# Altium PCB PowerRegulationBoardV2.PcbDoc
Units mm, origin at the board's own origin, x right, y up, seen from the top; angles counter-clockwise.
Board outline 164.97 x 158.5 mm, 2 copper layers (Top Layer, Bottom Layer); 34 components, 25 nets, 116 pads, 5 vias.
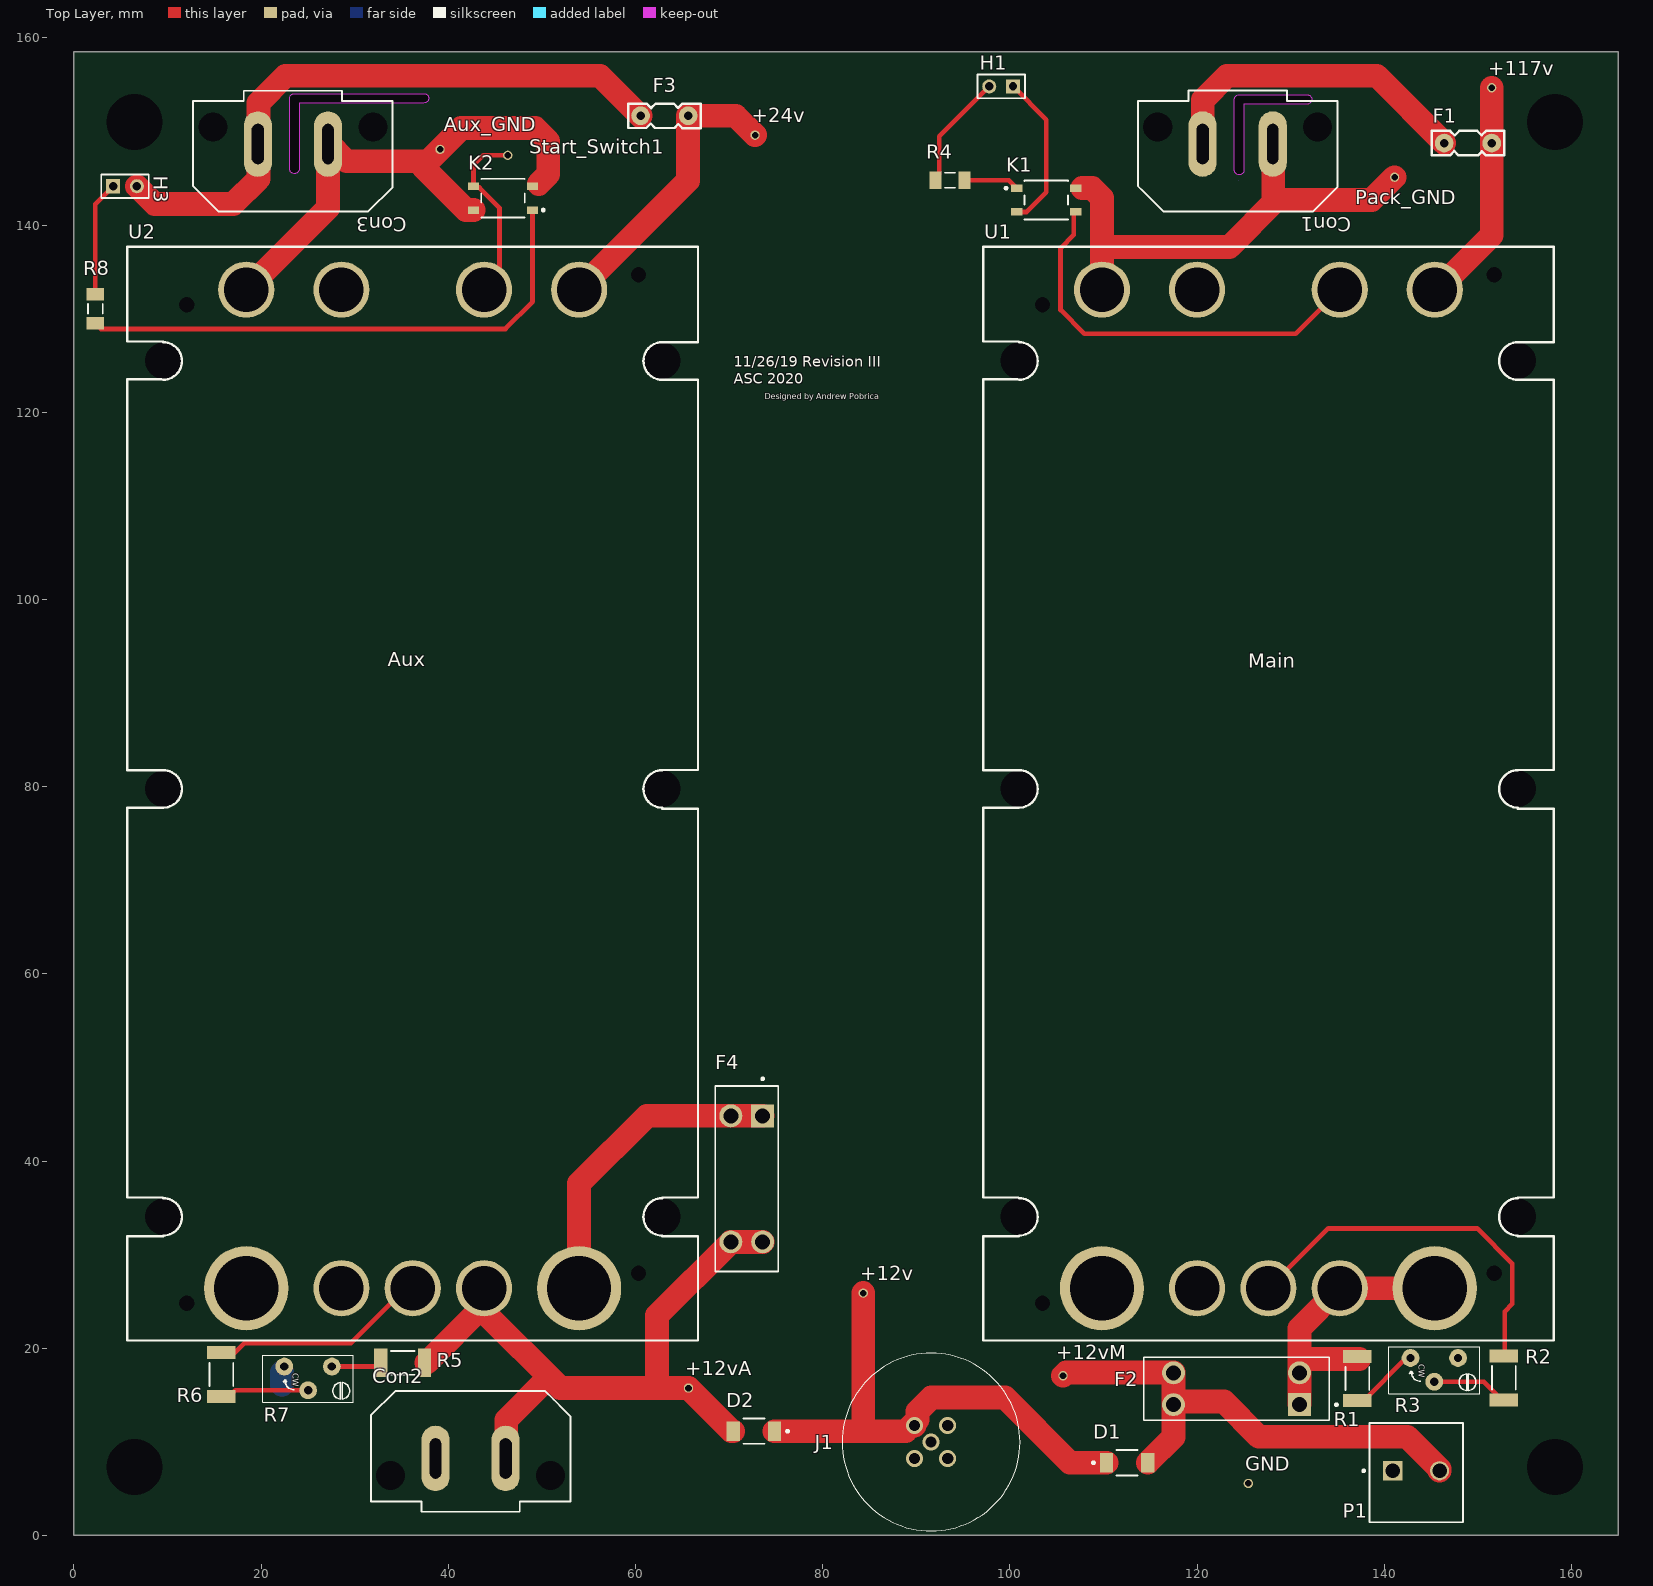
[diagram p0: Top Layer view]
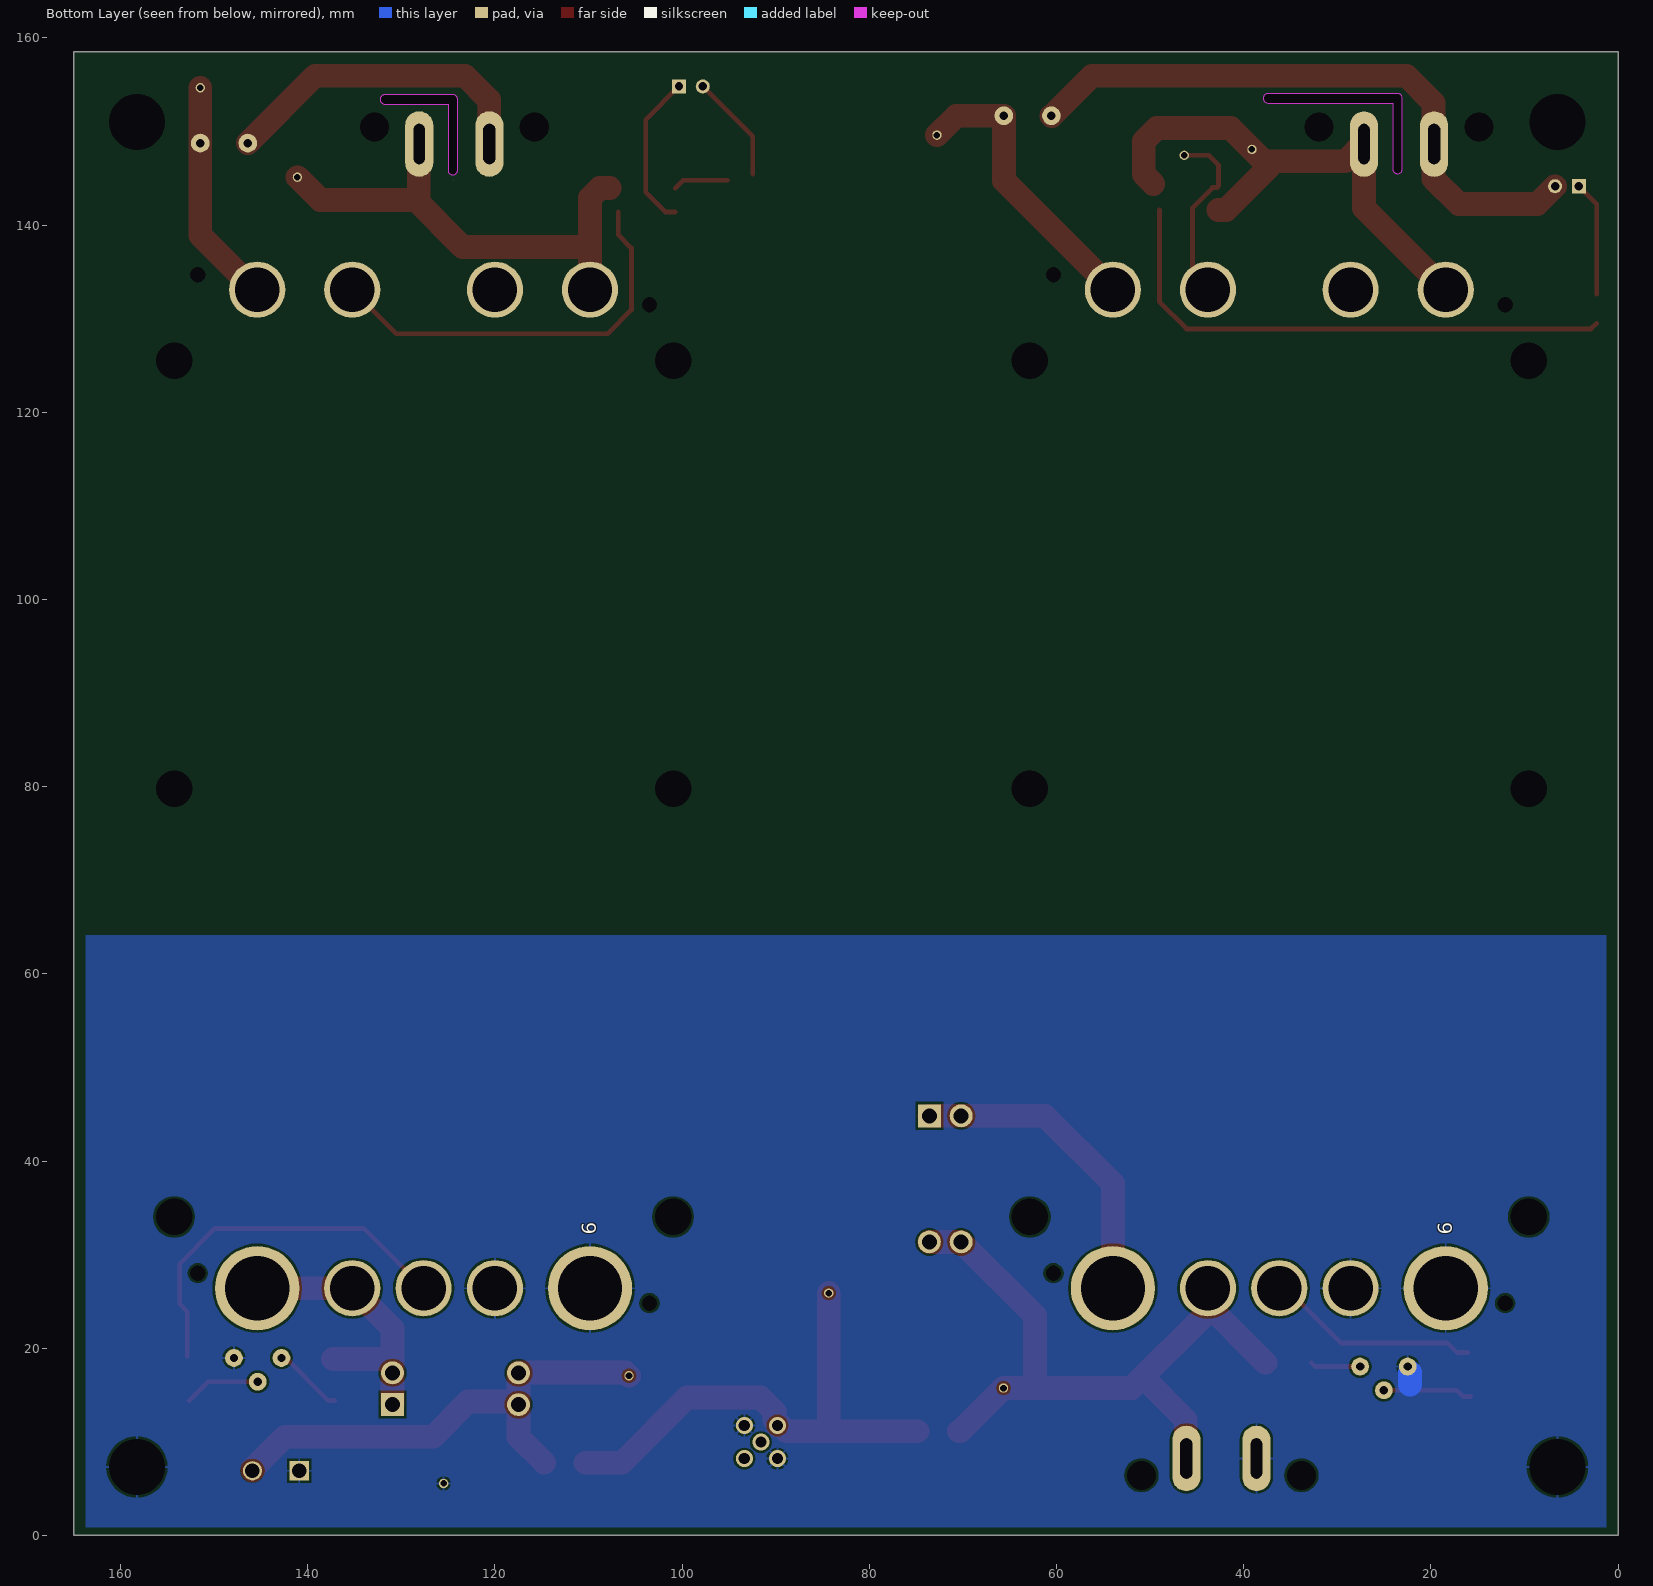
[diagram p1: Bottom Layer view, seen from below]

## Layer stack, top to bottom
Top Solder: solder mask 0.0102, Solder Resist, Dk 3.5
Top Layer: signal copper 0.0356
Dielectric 1: dielectric 0.32, FR-4, Dk 4.8
Bottom Layer: signal copper 0.0356
Bottom Solder: solder mask 0.0102, Solder Resist, Dk 3.5

## Board outline
0,0 164.973,0 164.973,158.496 0,158.496
cut-out: 23.558,145.496 cw(c23.554,146.002) 23.051,145.953 23.051,153.594 cw(c23.554,153.545) 23.558,154.051 37.402,154.051 cw(c37.378,153.52) 37.91,153.543 cw(c37.379,153.566) 37.402,153.035 24.067,153.035 24.067,145.953 cw(c23.563,146.002)
cut-out: 124.498,145.369 cw(c124.494,145.875) 123.99,145.826 123.99,153.467 cw(c124.494,153.418) 124.498,153.924 131.788,153.924 cw(c131.739,153.42) 132.245,153.416 cw(c131.739,153.412) 131.788,152.908 125.006,152.908 125.006,145.826 cw(c124.502,145.875)
cut-out: 124.46,144.78

## Design rules (kind name [scope] priority, off if disabled: settings)
Clearance [All] p1: gap=0.254 ignorepadtopadclearanceinfootprint=FALSE except(0: Arc-Hole Track-Hole SMDPad-Hole THPad-Hole Via-Hole Fill-Hole Poly-Hole Region-Hole Text-Hole)
HoleSize [All] p1: absolutevalues=TRUE maxlimit=12.7 minlimit=0.025 maxpercent=80.000 minpercent=20.000
MinimumSolderMaskSliver [All] p1: minsoldermaskwidth=0.127
PolygonConnect [All] p1: connectstyle=Relief reliefconductorwidth=0.254 reliefentries=4 polygonreliefangle="90 Angle" airgapwidth=0.254
RoomDefinition PowerRegulationBoardV2 [InComponentClass('PowerRegulationBoardV2')] p1: confinementstyle=ConfineIn formatcopy=TRUE lockcomponents=FALSE outline -11.811,-0.508 185.928,-0.508 185.928,162.052 -11.811,162.052
RoutingVias [All] p1: holewidth=0.711 width=1.27 viastyle="Through Hole" minholewidth=0.711 minwidth=1.27 maxholewidth=0.711 maxwidth=1.27
SilkToSilkClearance [All] p1: silktosilkclearance=0.127
SilkToSolderMaskClearance [IsPad] p1: minsilkscreentomaskgap=0.076 clearancetoexposedcopper=TRUE
SolderMaskExpansion [All] p1: expansion=0.102
Width Power [InNetClass('PowerNets')] p1: maxlimit=2.54 minlimit=0.635 preferedwidth=2.54 minimp=50.000000 maximp=50.000000 favimp=50.000000
Width [All] p2: maxlimit=0.508 minlimit=0.508 preferedwidth=0.508 minimp=50.000000 maximp=50.000000 favimp=50.000000
26 further rules are at their usual default settings.

## Classes and differential pairs
net class PowerNets: 13.8V_Aux +12 GND Net+12vA_1 Net+12vM_1 Net+24v_1 Net+117v_1 NetAux_GND_1 NetCon1_1 NetCon1_2 NetCon3_2 NetF2_1

## Components (designator, comment, footprint, x,y, rotation, side; value= is the part's Value field where it differs from the comment)
+12v "Testpoint" TestPoint 84.328,25.892 r90 top
+12vA "Testpoint" TestPoint 65.659,15.748 r0 top
+12vM "Testpoint" TestPoint 105.672,17.064 r0 top
+24v "Testpoint" TestPoint 72.771,149.606 r90 top
+117v "Testpoint" TestPoint 151.471,154.67 r90 top
Aux_GND "Testpoint" TestPoint 39.116,148.082 r90 top
Con1 "Battery Con" "Battery Con" 124.682,148.757 r180 top
Con2 "Battery Con" "Battery Con" 42.037,8.128 r0 top
Con3 "Battery Con" "Battery Con" 23.742,148.751 r180 top
D1 "PMEG3050EP,115" Nexperia_SOD128_0 112.522,7.769 r0 top
D2 "PMEG3050EP,115" Nexperia_SOD128_0 72.644,11.142 r180 top
F1 "PC TRON Fuse 5A" "PC TRON 5A" 148.971,148.717 r0 top
F2 "3557-2" Keystone_3557-2_0 124.206,15.675 r180 top
F3 "PC TRON Fuse 5A" "PC TRON 5A" 63.119,151.638 r0 top
F4 "3557-2" Keystone_3557-2_0 71.882,38.1 r270 top
GND "Testpoint" TestPoint 125.476,5.556 r90 top
H1 "Header 0" HDR1X2 100.33,154.813 r180 top
H3 "Header 0" HDR1X2 4.191,144.145 r0 top
J1 "1542761" 1542761 91.577,9.978 r225 top
K1 "CPC1117N" CPC1117N 103.886,142.67 r270 top
K2 "CPC1117N" CPC1117N 45.847,142.875 r90 top
P1 "SCREW-5.0/5.08 2WAYS" SCREW-5.0-2WAYS_V 143.401,6.909 r0 top
Pack_GND "Testpoint" TestPoint 141.097,145.114 r90 top
R1 "Thick Film" Vishay_WSL2010_0 137.115,16.764 r90 top value=20k
R2 "Thick Film" Vishay_WSL2010_0 152.768,16.842 r90 top value=91k
R3 "25 Turn" "TrimPot_THT_2.54mm pitch" 147.879,18.966 r270 top value=10k
R4 "RK73H2BTTD3320F" KOA_Speer_RK73H2B_IPC_A 93.599,144.78 r0 top
R5 "Thick Film" Vishay_WSL2010_0 35.126,18.447 r0 top value=20k
R6 "Thick Film" Vishay_WSL2010_0 15.752,17.197 r90 top value=91k
R7 "25 Turn" "TrimPot_THT_2.54mm pitch" 27.559,18.049 r270 top value=10K
R8 "CRCW12065K60FKEA" Vishay_CRCW1206_IPC_A 2.286,131.064 r270 top
Start_Switch1 "Testpoint" TestPoint 46.347,147.447 r0 top
U1 "DC-DC converter Maxi" "Vicor DC-DC Maxi" 127.615,73.406 r0 top
U2 "DC-DC converter Maxi" "Vicor DC-DC Maxi" 36.195,73.406 r0 top

## Footprints (in the part's own frame and the unit in brackets; to place one, negate y for a bottom-side part, rotate by r counter-clockwise, add the part's x,y. Pads: shape width x height; smd on the part's side, far side on the other; paste and mask are expansions set on the pad)
1542761 [mm]
  round 1.8 hole 1.2: 1(-2.5,0) 2(0,-2.5) 3(2.5,0) 4(0,2.5) 5(0,0)
  silkscreen extent -9.5,-9.5 9.5,9.5
"Battery Con" [mm] "Battery Connector for both Aux and Main battery"
  oval 3x7 hole 1.2 slot 4.3 at 90 deg: 1(-3.4,0.1)
  oval 3x7 hole 1.3 slot 4.3 at 90 deg: 2(4.09,0.1)
  round 0 hole 3.1 unplated: ""(-8.2,-1.705) ""(8.89,-1.705)
  silkscreen extent -10.3,-5.6 11,7.3
CPC1117N [mm]
  rect 0.8x1.2 smd paste+0 mask+0: 1(-1.27,-3.15) 2(1.27,-3.15) 3(1.27,3.15) 4(-1.27,3.15)
  silkscreen extent -2.07,-4.42 2.07,2.32, body extent -2.17,-3.85 2.17,3.85, height 0.25
HDR1X2 [mm] "Connector; Header; 2 Position"
  rect 1.5x1.5 hole 0.9: 1(0,0)
  round 1.5 hole 0.9: 2(2.54,0)
  silkscreen extent -1.27,-1.27 3.81,1.27
Keystone_3557-2_0 [mm]
  rect 2.45x2.45 hole 1.6 paste-1000 mask+0: 1(-6.735,1.7)
  round 2.45 hole 1.6 paste-1000 mask+0: 2(6.735,1.7) 3(-6.735,-1.7) 4(6.735,-1.7)
  silkscreen extent -10.8,-3.36 9.9,3.36, body extent -10.08,-3.54 10.08,3.54, height 0.25
KOA_Speer_RK73H2B_IPC_A [mm]
  rect 1.306x1.858 smd paste+0 mask+0: 1(-1.551,0) 2(1.551,0)
  silkscreen extent -0.52,-0.8 0.52,0.8, body extent -2.7,-1.43 2.7,1.43, height 0.25
Nexperia_SOD128_0 [mm]
  rect 1.4x2.1 smd paste-1000 mask+0: 1(-2.2,0) 2(2.2,0)
  silkscreen extent -3.72,-1.35 1.12,1.35, body extent -3.1,-1.7 3.1,1.7, height 0.25
"PC TRON 5A" [mm]
  round 2 hole 0.9: 1(-2.58,0.04) 2(2.5,0.04)
  silkscreen extent -3.91,-1.28 3.84,1.34
SCREW-5.0-2WAYS_V [mm] "Socket, Screw Terminal Block, 2-Leads, Pitch 5mm, 90 Degree Angle, Through-Hole"
  rect 2.05x2.05 hole 1.55: 1(-2.5,0)
  round 2.05 hole 1.55: 2(2.5,0)
  silkscreen extent -5.72,-5.5 5,5.1, body extent -5,-5.5 5.02,5.1, height 18.2
TestPoint [mm]
  round 1 hole 0.7: 1(0,0)
"TrimPot_THT_2.54mm pitch" [mil] "TRIMMER, MURATA, PV36Y"
  round 75 hole 35: 1(0,0) 2(100,-100) 3(0,-200)
  silkscreen extent -47,-291 150,91, body extent -47,-287 150,91, height 445
"Vicor DC-DC Maxi" [mm] "DC-DC converter that suits both Maxi and Mini version"
  round 6 hole 4.75: 1(17.78,59.69) 2(7.62,59.69) 3(-7.62,59.69) 4(-17.78,59.69) 6(7.62,-46.99) 7(0,-46.99) 8(-7.62,-46.99)
  round 9 hole 6.86: 5(17.78,-46.99) 9(-17.78,-46.99)
  round 3.38 hole 3.9: 10(-26.65,-39.37) 11(26.65,-39.37) 12(26.65,6.35) 13(26.65,52.07) 14(-26.65,52.07) 15(-26.65,6.35)
  round 0 hole 1.626: ""(-24.13,-48.59) ""(-24.13,58.09) ""(24.13,-45.39) ""(24.13,61.29)
  silkscreen extent -30.48,-52.58 30.48,64.26
Vishay_CRCW1206_IPC_A [mm]
  rect 1.306x1.858 smd paste+0 mask+0: 1(-1.551,0) 2(1.551,0)
  silkscreen extent -0.52,-0.8 0.52,0.8, body extent -2.7,-1.43 2.7,1.43, height 0.25
Vishay_WSL2010_0 [mm]
  rect 1.4x3.05 smd paste+0 mask+0: 1(-2.35,0) 2(2.35,0)
  silkscreen extent -1.25,-1.28 1.25,1.28, body extent -3.15,-1.63 3.15,1.63, height 0.25

## Part data
Con1 Con2 Con3: "Aux and Main battery connector"
H1 H3: library part "Header 2", "Header, 2-Pin", LatestRevisionDate=17-Jul-2002, LatestRevisionNote="Re-released for DXP Platform.", Publisher="Altium Limited"
J1: "Connector", Manufacturer_Name="Phoenix Contact", Mouser Part Number=651-1542761, RS Part Number=8025583, Allied_Number=70170366, Allied Price/Stock=https://www.alliedelec.com/phoenixcontact-1542761/70170366/, Datasheet Link=https://media.digikey.com/PDF/Data%20Sheets/Phoenix%20Contact%20PDFs/1542761.pdf, Height=18mm, Manufacturer_Part_Number=1542761, Mouser Price/Stock=https://www.mouser.com/Search/Refine.aspx?Keyword=651-1542761, RS Price/Stock=http://uk.rs-online.com/web/p/products/8025583
P1: library part CMP-0617-00009-1, "Socket, Screw Terminal Block, 2 Way, 5.0 mm Pitch, 90 Degree Angle, Through-Hole", Contact Resistance="20 mOhm", Insulation Resistance="5000 MOhm / 1000 V", Manufacturer="No Vendor", Rated Current="25 A", Rated Voltage="300 V", Temperature Range="-40 to 105 degC", ComponentLink1Description=Datasheet, ComponentLink1URL="5mm screw terminal in SVN", Mounting Technology="Through Hole", PackageDescription="Socket, Screw Terminal Block, 2 Way, Pitch 5 mm, 90 Degree Angle, Through-Hole", PartNumber="SCREW-5.0/5.08 2WAYS", Poles=2
R1: library part RES_10R_2010_5%, "RES SMD 20K OHM 1% 3/4W 2010", Manufacturer 1=Vishay/Dale, Manufacturer Part Number 1=CRCW120610R0JNEA, Package / Case=2010, Ratings=1/4W, Supplier Part Number 1=541-10ECT-ND, Tolerance=±5%, ComponentLink1Description=http://www.vishay.com/doc?20035, ComponentLink1URL=http://www.vishay.com/doc?20035, SCDType=undef, Supplier 1=Digi-Key
R2 R6: library part RES_10R_2010_5%, "RES SMD 91K OHM 5% 3/4W 2010  /  CRCW201091K0JNEF", Manufacturer 1=Vishay/Dale, Manufacturer Part Number 1=CRCW120610R0JNEA, Package / Case=2010, Ratings=1/4W, Supplier Part Number 1=541-10ECT-ND, Tolerance=±5%, ComponentLink1Description=http://www.vishay.com/doc?20035, ComponentLink1URL=http://www.vishay.com/doc?20035, SCDType=undef, Supplier 1=Digi-Key
R3 R7: library part RES_TRIMMER_1K_25T_THT, "TRIMMER 10K OHM 0.25W PC PIN TOP  /  64WR10KLF", Manufacturer 1="Murata Electronics North America", Manufacturer Part Number 1=PV36Y102C01B00, Ratings="25 turn variable cermet", Supplier Part Number 1=490-2912-ND, Tolerance=10%, SCDType=spec, Supplier 1=Digi-Key
R4: Part Number=332O
R5: library part RES_10R_2010_5%, "RES SMD 20K OHM 1% 3/4W 2010 /  CRCW20101K20FKEF", Manufacturer 1=Vishay/Dale, Manufacturer Part Number 1=CRCW120610R0JNEA, Package / Case=2010, Ratings=1/4W, Supplier Part Number 1=541-10ECT-ND, Tolerance=±5%, ComponentLink1Description=http://www.vishay.com/doc?20035, ComponentLink1URL=http://www.vishay.com/doc?20035, SCDType=undef, Supplier 1=Digi-Key
R8: Part Number=5.6kO
D1 D2: Part Number=PMEG3050EP,115
F2: Part Number=3557-2

## Free pads (board coordinates)
  round 0 hole 6: 5(6.477,7.31) 5(6.477,151.003) 5(158.242,7.31) 5(158.242,151.003)

## Via types
v1: diameter 1.8, hole 1.2, Top Layer to Bottom Layer, 5 vias

## Nets (pads, with @x,y where several pads share a name; then routed paths per layer and width w, separated by ;. In a path a pad name is that pad's centre, name@x,y a point inside that pad or via, vN(x,y) a via of type N, cw(c..) or ccw(c..) an arc to the next point about the centre after c; other vN are vias at no path point)
13.8V_Aux: F4.1 F4.3 U2.5 | length 34.3
  Top Layer w2.54: U2.5@53.58,26.021 U2.5 53.975,37.592 61.218,44.835 F4.3 F4.1
+12: +12v.1 D1.1 D2.1 J1.2 | length 54.9
  Top Layer w2.54: D2.1 88.866,11.142 J1.2@89.47,11.746 ; +12v.1 84.328,11.811 84.393,11.746 ; v1(89.809,11.746) J1.2@89.47,11.746 ; D1.1 106.423,7.769 99.46,14.732 91.599,14.732 90.111,13.244 90.111,12.387 J1.2@89.47,11.746
GND: Con2.1 GND.1 J1.1 J1.3 P1.1 pad.5@6.477,7.31 pad.5@158.242,7.31 R3.1 R7.3 U1.8 U1.9 U2.8 U2.9 | length 1.3
  Bottom Layer w2.54: 22.225,16.129 R7.3@22.225,17.399
  other v1: 89.809,8.21 93.345,11.746
Net+12vA_1: +12vA.1 Con2.2 D2.2 F4.2 F4.4 R5.2 U2.6 | length 77
  Top Layer w2.54: R5.2@37.666,18.447 U2.6@43.815,24.596 ; U2.6 U2.6@43.815,24.596 ; U2.6@44.257,25.781 44.257,25.81 43.931,26.137 44.489,26.137 U2.6@44.605,26.021 ; Con2.2@46.101,8.282 46.189,8.37 46.189,12.331 50.607,16.748 ; D2.2 70.265,11.142 +12vA.1 62.308,15.748 ; F4.2 F4.4 62.308,23.491 62.308,15.748 ; U2.6@43.815,24.596 43.815,23.894 51.961,15.748 62.308,15.748
Net+12vM_1: +12vM.1 D1.2 F2.2 F2.4 P1.2 | length 54.3
  Top Layer w2.54: +12vM.1 106.02,17.412 117.471,17.412 F2.4 F2.2@117.471,14.302 ; D1.2 117.471,10.518 F2.2 F2.2@117.471,14.302 ; P1.2 145.901,7.1 142.46,10.541 126.619,10.541 122.858,14.302 F2.2@117.471,14.302
Net+24v_1: +24v.1 F3.2 U2.1 | length 31.4
  Top Layer w2.54: U2.1 65.619,144.74 F3.2 70.699,151.678 +24v.1
Net+117v_1: +117v.1 F1.2 U1.1 | length 24.3
  Top Layer w2.54: U1.1 145.669,133.096 151.471,138.898 F1.2 +117v.1
NetAux_GND_1: Aux_GND.1 Con3.1 K2.2 K2.4 U2.4 | length 58.9
  Top Layer w2.54: U2.4 27.142,141.823 Con3.1 27.142,148.813 29.143,146.812 37.846,146.812 ; K2.4 41.891,141.605 37.265,146.231 37.846,146.812 ; 49.657,144.399 50.673,145.415 50.673,148.961 49.276,150.358 41.392,150.358 Aux_GND.1 37.846,146.812
NetCon1_1: Con1.1 K1.4 Pack_GND.1 U1.4 | length 53
  Top Layer w2.54: 107.736,143.945 108.785,143.945 109.835,142.895 109.835,137.414 ; U1.4 109.835,137.414 ; Con1.1@128.143,148.748 128.14,148.751 128.14,142.976 128.446,142.67 ; Pack_GND.1 138.653,142.67 128.446,142.67 ; 109.835,137.414 110.084,137.663 123.439,137.663 128.446,142.67
NetCon1_2: Con1.2 F1.1 | length 34.8
  Top Layer w2.54: Con1.2@120.523,148.463 120.611,148.551 120.611,153.377 123.185,155.951 139.197,155.951 F1.1
NetCon3_2: Con3.2 F3.1 H3.2 | length 66.8
  Top Layer w2.54: H3.2 8.636,142.24 17.018,142.24 19.714,144.936 19.714,148.751 19.714,153.048 22.617,155.951 56.197,155.951 60.504,151.643 F3.1
NetF2_1: F2.1 F2.3 R1.2 U1.5 U1.6 | length 29.6
  Top Layer w2.54: F2.1@130.941,14.031 F2.3 130.941,22.122 U1.6 U1.5 ; 132.098,18.859 R1.2@137.327,18.859
NetH1_1: H1.1 K1.2 | length 16.8
  Top Layer w0.508: H1.1 103.886,151.257 103.886,143.497 101.789,141.4 K1.2
NetH1_2: H1.2 R4.1 | length 11.6
  Top Layer w0.508: R4.1@92.447,145.455 92.447,149.47 H1.2
NetH3_1: H3.1 R8.1 | length 12.3
  Top Layer w0.508: R8.1 2.286,142.24 H3.1
NetK1_1: K1.1 R4.2 | length 5.9
  Top Layer w0.508: R4.2 99.896,144.78 K1.1
NetK1_3: K1.3 U1.2 | length 43.9
  Top Layer w0.508: K1.3@106.807,141.4 106.807,138.943 105.41,137.546 105.41,130.937 107.95,128.397 130.536,128.397 U1.2
NetK2_1: K2.1 R8.2 | length 58
  Top Layer w0.508: R8.2 2.894,128.905 46.101,128.905 48.997,131.801 K2.1
NetK2_3: K2.3 Start_Switch1.1 U2.2 | length 19.5
  Top Layer w0.508: U2.2 43.815,133.279 45.466,134.93 45.466,141.859 43.326,143.999 42.843,143.999 K2.3 42.697,146.417 43.727,147.447 Start_Switch1.1
NetR1_1: R1.1 R3.3 | length 8.2
  Top Layer w0.508: R1.1 137.813,14.414 142.364,18.966 R3.3 R3.3@143.417,18.966
NetR2_1: R2.1 R3.2 | length 8.2
  Top Layer w0.508: R3.2 150.644,16.426 R2.1@152.673,14.397
NetR2_2: R2.2 U1.7 | length 40.5
  Top Layer w0.508: U1.7 134.005,32.806 149.912,32.806 153.67,29.047 153.67,24.731 152.863,23.924 R2.2@152.863,19.114
NetR5_1: R5.1 R7.1 | length 5.4
  Top Layer w0.508: R7.1 32.378,18.049 R5.1
NetR6_1: R6.1 R7.2 | length 9.5
  Top Layer w0.508: R6.1 16.577,14.847 17.24,15.509 R7.2
NetR6_2: R6.2 U2.7 | length 23
  Top Layer w0.508: R6.2@16.002,19.558 17.219,19.558 18.235,20.574 29.605,20.574 35.447,26.416 U2.7
pads on no net: Con1. Con2. Con3. J1.4 J1.5 U1. U1.3 U1.10 U1.11 U1.12 U1.13 U1.14 U1.15 U2. U2.3 U2.10 U2.11 U2.12 U2.13 U2.14 U2.15
copper on no net:
  other v1: 93.345,8.21 91.577,9.978

## Polygon pours and split planes (outlines as drawn)
GND on Bottom Layer "Bottom Layer-GND" (solid, pour order 0): 1.27,64.135 1.27,0.889 163.703,0.889 163.703,64.135

## Silkscreen, mask and mechanical layers (free items; w line width, h text height)
Top Overlay:
  text "11/26/19 Revision III" at 70.485,124.841 h1.14
  text "ASC 2020" at 70.485,123.063 h1.14
  text "Designed by Andrew Pobrica" at 73.825,121.412 h0.64
  text "Aux" at 33.528,92.837 h1.52
  text "Main" at 125.476,92.71 h1.52

## Text inside footprints (layer, text, board x,y; h text height)
R3: Top Overlay "CW" at 143.679,18.266 h0.64 r270
R7: Top Overlay "CW" at 23.359,17.349 h0.64 r270
U1: Bottom Overlay "9" at 110.695,33.486 h1.52 r90
U2: Bottom Overlay "9" at 19.275,33.486 h1.52 r90